# Altium PCB BB.GW.001.01.01.0 — копия.PcbDoc
Units mm, origin at the board's own origin, x right, y up, seen from the top; angles counter-clockwise.
Board outline 101.6 x 53 mm, 2 copper layers (Top Layer, Bottom Layer); 61 components, 35 nets, 162 pads, 0 vias.
Unrouted connection lines stored in the file: 81.
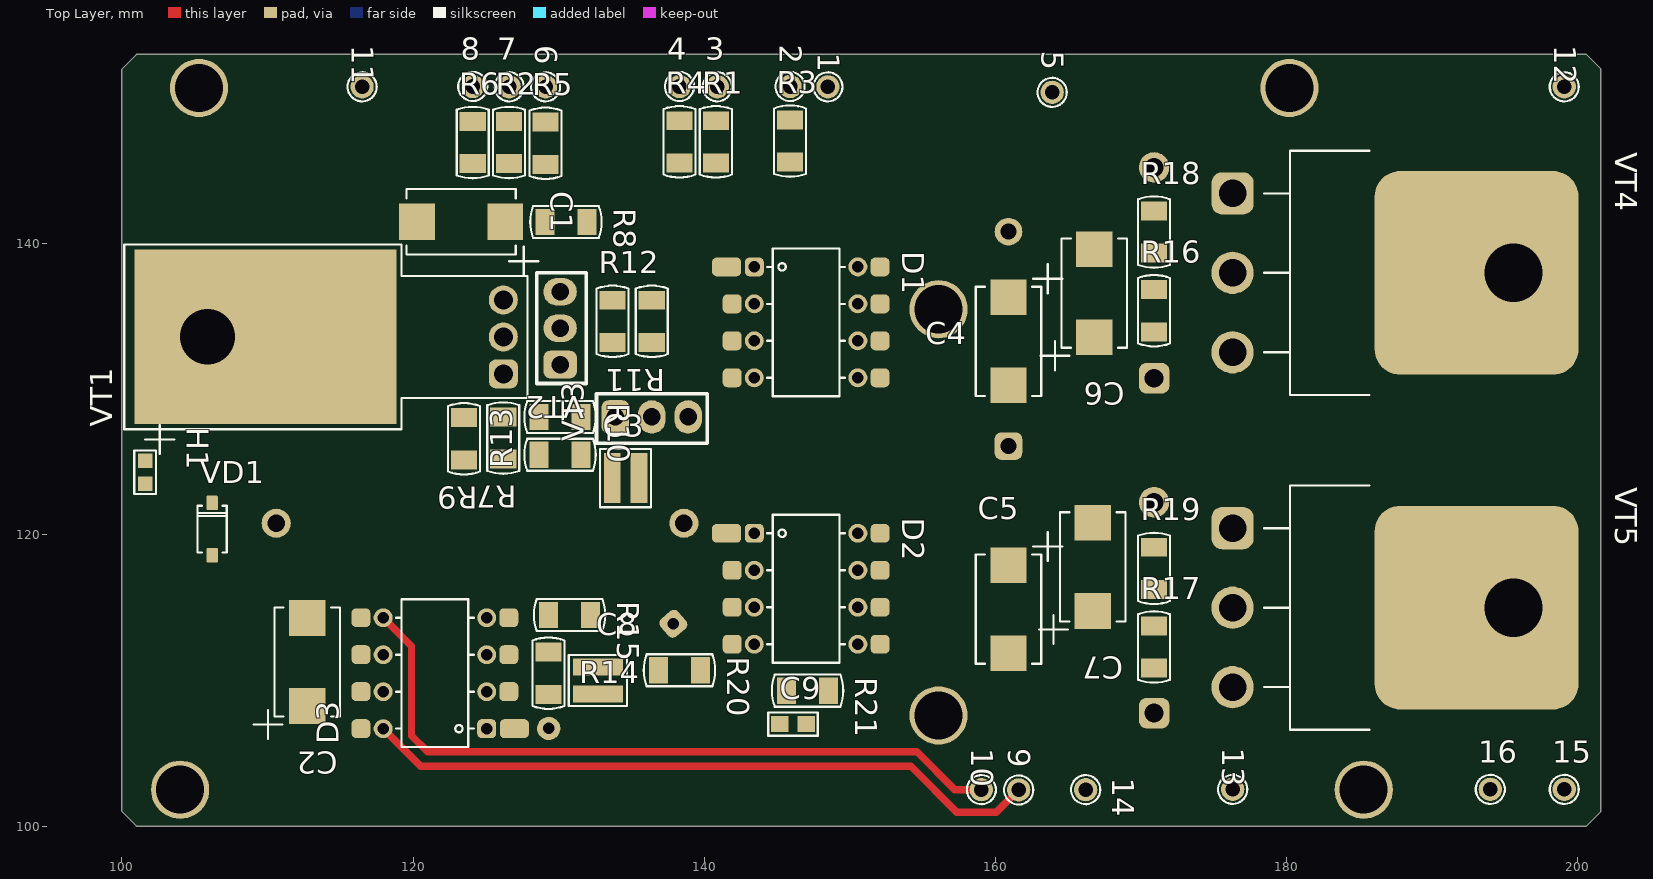
[diagram p0: Top Layer view]
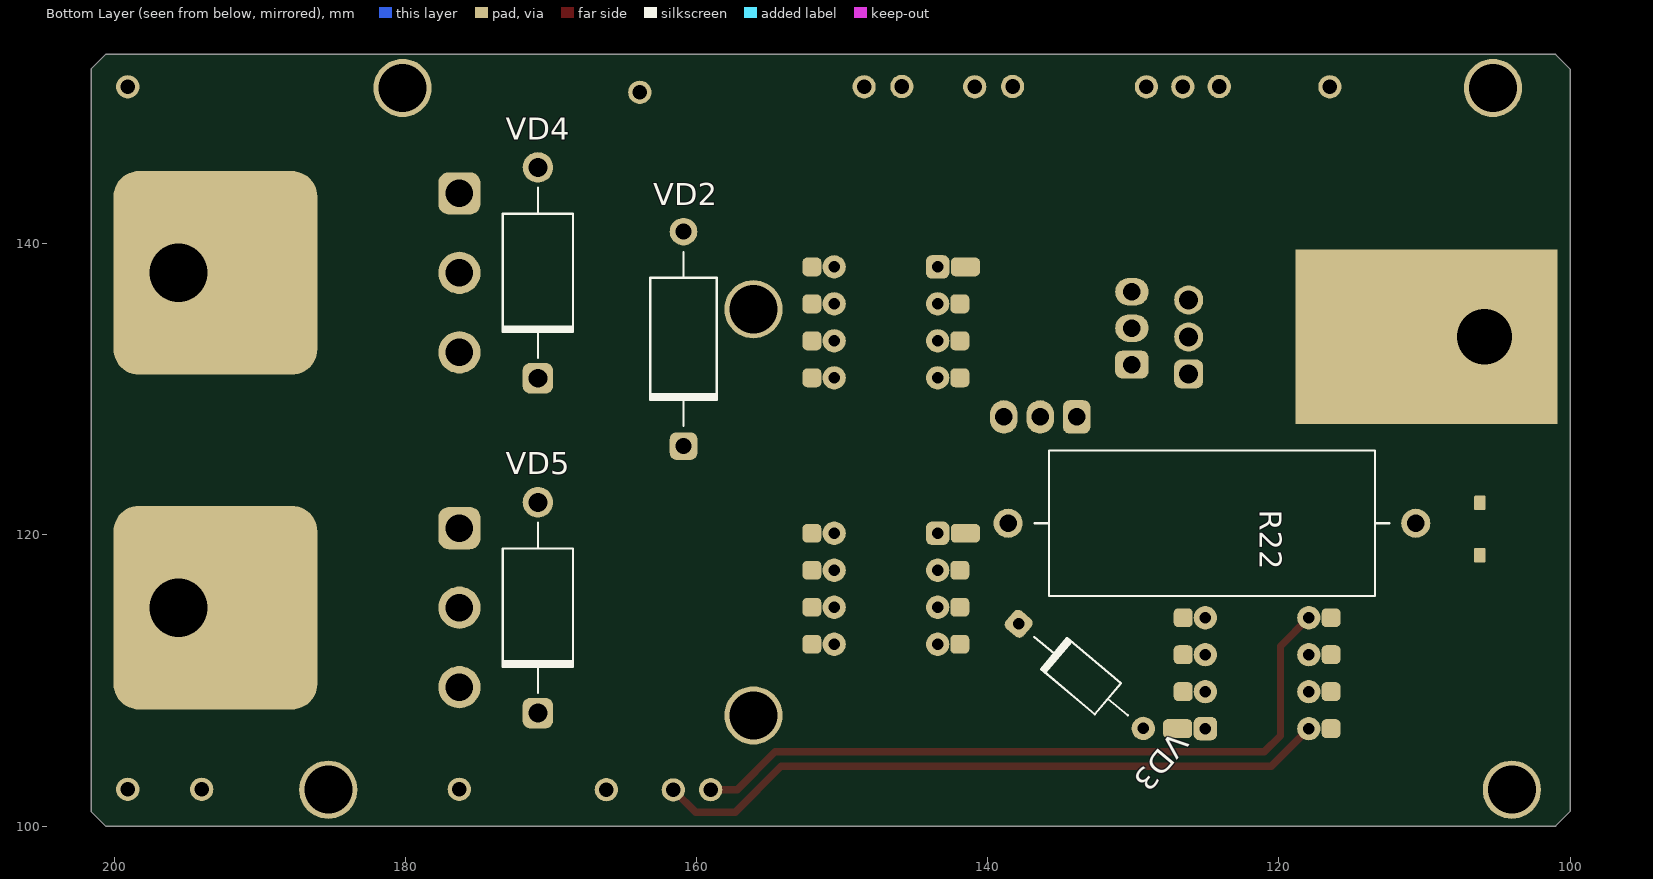
[diagram p1: Bottom Layer view, seen from below]

## Layer stack, top to bottom
Top Solder: solder mask 0.0102, Solder Resist, Dk 3.5
Top Layer: signal copper 0.0356
Dielectric 1: dielectric 0.32, FR-4, Dk 4.8
Bottom Layer: signal copper 0.0356
Bottom Solder: solder mask 0.0102, Solder Resist, Dk 3.5

## Board outline
101,100 100,101 100,152 101,153 200.6,153 201.6,152 201.6,101 200.6,100

## Design rules (kind name [scope] priority, off if disabled: settings)
Clearance [All] p1: gap=0.5 ignorepadtopadclearanceinfootprint=FALSE
PolygonConnect [All] p1: connectstyle=Relief reliefconductorwidth=0.254 reliefentries=4 polygonreliefangle="90 Angle" airgapwidth=0.254
RoutingVias [All] p1: holewidth=0.5 width=1.1 viastyle="Through Hole" minholewidth=0.5 minwidth=1.1 maxholewidth=0.5 maxwidth=1.1
SolderMaskExpansion [All] p1: expansion=0.102
Width Width_PowerLine [InNetClass('PowerLine')] p1: maxlimit=5 minlimit=1.5 preferedwidth=2
Width [All] p2: maxlimit=10 minlimit=0.5 preferedwidth=0.5 minimp=50.000000 maximp=50.000000 favimp=50.000000
30 further rules are at their usual default settings.

## Classes and differential pairs
net class PowerLine: Net12_1 Net13_1 Net14_1 Net15_1 NetC8_1

## Components (designator, comment, footprint, x,y, rotation, side; value= is the part's Value field where it differs from the comment)
1 "TP" TP1 148.5,150.78 r0 top
2 "TP" TP1 145.9,150.8 r0 top
3 "TP" TP1 140.9,150.78 r0 top
4 "TP" TP1 138.3,150.8 r0 top
5 "TP" TP1 163.9,150.4 r0 top
6 "TP" TP1 129.1,150.78 r0 top
7 "TP" TP1 126.6,150.78 r0 top
8 "TP" TP1 124.1,150.8 r0 top
9 "TP" TP1 161.6,102.48 r0 top
10 "TP" TP1 159.04,102.5 r0 top
11 "TP" TP1 116.5,150.78 r0 top
12 "TP" TP1 199.08,150.78 r0 top
13 "TP" TP1 176.3,102.52 r0 top
14 "TP" TP1 166.2,102.5 r270 top
15 "TP" TP1 199.08,102.52 r0 top
16 "TP" TP1 194,102.52 r0 top
C1 "47 мкФ" CAPMP7343X31N 123.3,141.5 r0 top
C2 "47 мкФ" CAPMP7343X31N 112.73,111.27 r270 top
C3 "33 п" CAPC1632X115M 134.6,123.9 r0 top
C4 "47 мкФ" CAPMP7343X31N 160.9,133.3 r90 top
C5 "47 мкФ" CAPMP7343X31N 160.9,114.9 r90 top
C6 "2.2 мкФ" CAPMP7343X31N 166.8,136.6 r270 top
C7 "2.2 мкФ" CAPMP7343X31N 166.7,117.8 r270 top
C8 "33 п" CAPC1632X115M 132.7,110 r90 top
C9 "100 пФ" CAPC1608M 146.1,107 r0 top
D1 "МикросхемаHCPL-3120" DIP-8 147,134.6 r270 top
D2 "МикросхемаHCPL-3120" DIP-8 147,116.3 r270 top
D3 "МикросхемаHCPL-3120" DIP-8 121.5,110.5 r90 top
H1 "KPG-1608ZGC" LED_1608X25N 101.6,124.3 r270 top
R1 "0" RESC3216N 140.8,147 r90 top
R2 "0" RESC3216N 126.6,146.95 r90 top
R3 "0" RESC3216N 145.9,147.05 r90 top
R4 "0" RESC3216N 138.3,147 r90 top
R5 "0" RESC3216N 129.1,146.9 r90 top
R6 "0" RESC3216N 124.1,146.95 r90 top
R7 "270" RESC3216N 126.2,126.65 r270 top
R8 "270" RESC3216N 130.5,141.5 r0 top
R9 "270" RESC3216N 123.5,126.6 r270 top
R10 "270" RESC3216N 130.1,128.1 r0 top
R11 "270" RESC3216N 136.4,134.67 r270 top
R12 "270" RESC3216N 133.7,134.67 r90 top
R13 "270" RESC3216N 130.1,125.5 r180 top
R14 "620" RESC3216N 129.3,110.5 r270 top
R15 "270" RESC3216N 130.75,114.5 r0 top
R16 "270 k" RESC3216N 170.9,135.4 r90 top
R17 "270 k" RESC3216N 170.9,112.3 r90 top
R18 "10" RESC3216N 170.9,140.8 r90 top
R19 "10" RESC3216N 170.9,117.7 r90 top
R20 "270" RESC3216N 138.3,110.7 r0 top
R21 "0" RESC3216N 147.1,109.3 r0 top
R22 "0.11" RESW_SQP-7 124.6,120.8 r180 bottom
VD1 "1N4148" SOD-123 106.2,120.4 r90 top
VD2 "FR20" DO-15 160.9,133.466 r90 bottom
VD3 "BZX5V1" DO-35 133.6,110.3 r220 bottom
VD4 "Stabistor_P6KE15CA" D2A 170.9,138 r90 bottom
VD5 "Stabistor_P6KE15CA" D2A 170.9,115 r90 bottom
VT1 "F9Z34N" TO-220_TH_Horizontal_Var#1 114.135,133.6 r90 top
VT2 "TRANSBIPOL_КТ361" Rus_КT-13 130.2,134.2 r270 top
VT3 "TRANSBIPOL_КТ315" Rus_КT-13 136.4,128 r180 top
VT4 "IGBT_IRG7PH42UD2PDF" TO-247AC 176.296,138 r270 top
VT5 "IGBT_IRG7PH42UD2PDF" TO-247AC 176.296,115 r270 top

## Footprints (in the part's own frame and the unit in brackets; to place one, negate y for a bottom-side part, rotate by r counter-clockwise, add the part's x,y. Pads: shape width x height; smd on the part's side, far side on the other; paste and mask are expansions set on the pad)
CAPC1608M [mm] "Chip Capacitor, Body 1.6x0.8mm, IPC Low Density"
  rect 1.2x1.1 smd: 1(-0.9,0) 2(0.9,0)
  Top Layer pour cut-out: -0.3,0.8 -0.3,-0.8 0.3,-0.8 0.3,0.8
  silkscreen extent -1.7,-0.8 1.7,0.8, body extent -0.88,-0.48 0.88,0.47, height 0.85
CAPC1632X115M [mm] "Chip Capacitor, 2-Leads, Body 1,6x3,2mm, IPC Low Density"
  rect 1.15x3.45 smd: 1(-0.925,0) 2(0.925,0)
  Top Layer pour cut-out: -0.4,2 -0.4,-2 0.4,-2 0.4,2
  silkscreen extent -1.75,-2 1.75,2, body extent -0.88,-1.67 0.87,1.68, height 1.15
CAPMP7343X31N [mm] "Molded Capacitor, 2-Leads, Body 7,30x4,30mm, IPC Medium Density"
  rect 2.45x2.5 smd: 1(-3.025,0) 2(3.025,0)
  silkscreen extent -3.75,-3.7 5.3,2.25, body extent -3.97,-2.25 3.97,2.25, height 3.1
D2A [mm]
  rrect50% 2.1x2.1 hole 1.3: 1(-7.239,0)
  round 2.1 hole 1.3: 2(7.239,0)
  silkscreen extent -5.84,-2.41 5.84,2.41
DIP-8 [mm]
  rrect50% 1.3x2 all layers, no hole: 1(-3.81,-5.461)
  rrect50% 1.3x1.3 / inner rrect50% 1.3x1.3 / far side rrect50% 1.6x1.6 hole 0.8: 1(-3.81,-3.556)
  rrect50% 1.3x1.3 all layers, no hole: 2(-1.27,-5.08) 3(1.27,-5.08) 4(3.81,-5.08) 5(3.81,5.08) 6(1.27,5.08) 7(-1.27,5.08) 8(-3.81,5.08)
  round 1.3 / inner round 1.3 / far side round 1.6 hole 0.8: 2(-1.27,-3.556) 3(1.27,-3.556) 4(3.81,-3.556) 5(3.81,3.556) 6(1.27,3.556) 7(-1.27,3.556) 8(-3.81,3.556)
  silkscreen extent -5.08,-2.67 5.08,2.67
DO-15 [mm]
  rrect50% 1.9x1.9 hole 1.1: 1(-7.366,0)
  round 1.9 hole 1.1: 2(7.366,0)
  silkscreen extent -5.97,-2.29 5.97,2.29
DO-35 [mm]
  rrect50% 1.6x1.6 hole 0.8: 1(-5.588,0)
  round 1.6 hole 0.8: 2(5.588,0)
  silkscreen extent -4.19,-1.4 4.19,1.4
LED_1608X25N [mm] "Chip LED lamp, 2-Leads, Body 1,60x0,80mm, IPC Medium Density"
  rect 1x1 smd: 1(-0.8,0) 2(0.8,0)
  silkscreen extent -3.25,-0.75 1.5,2, body extent -0.8,-0.4 0.8,0.4, height 0.62
RESC3216N [mm] "Chip Resistor, Body 3.2x1.6mm, IPC Medium Density"
  rect 1.3x1.8 smd: 1(-1.45,0) 2(1.45,0)
  Top Layer pour cut-out: -0.8,0.9 0.8,0.9 0.8,-0.9 -0.8,-0.9
  silkscreen extent -2.45,-1.1 2.45,1.1, body extent -1.68,-0.87 1.68,0.87, height 0.71
RESW_SQP-7 [mm] "Резистор мощный проволочный 5Вт; Body"
  round 2 hole 1.2: 1(-14,0) 2(14,0)
  silkscreen extent -12.2,-5 12.2,5, body extent -14.4,-4.5 14.4,4.5, height 9.5
Rus_КT-13 [mm] "THD; Body: L=7.2mm, B=3mm, H=5mm; Weight: ?g; Транзистор КТ315(А...И)"
  rrect50% 1.9x2.3 hole 1.2: B(2.5,-0.1)
  oval 1.9x2.3 hole 1.2: C(0,-0.1) E(-2.5,-0.1)
  silkscreen extent -3.8,-1.7 3.8,1.7, body extent -3.6,-1.5 3.6,1.5, height 6.7
SOD-123 [mm]
  rrect25% 1x0.8 all layers, no hole: 1(-1.8,0) 2(1.8,0)
  silkscreen extent -1.6,-1 1.6,1, body extent -1.9,-0.8 1.9,0.8, height 1.4
TO-220_TH_Horizontal_Var#1 [mm] "Transistor outline, TO-220, TH, требуеться прошивка. Формовку выводов см. приспособление ЛБИЮ.7803-0021-000 СБ"
  rrect50% 2x2 hole 1.3: 1(-2.54,-12.065)
  round 2 hole 1.3: 2(0,-12.065) 3(2.54,-12.065)
  rect 12x18 hole 3.8 copper offset 0,-3.986: 4(0,8.255)
  silkscreen extent -6.35,-13.72 6.35,13.97, body extent -5.27,-12.3 5.27,11.05, height 4.7
TO-247AC [mm]
  rrect25% 14x14 hole 4 copper offset 0,-2.54: C(0,19.304)
  round 2.9 hole 1.9: C(0,0) E(5.46,0)
  rrect50% 2.9x2.9 hole 1.9: G(-5.46,0)
  silkscreen extent -8.38,2.16 8.38,9.4
TP1 [mm] "Test point 1x1.6"
  round 1.6 hole 1 paste+0: 1(0,0)
  silkscreen extent -1,-1 1,1

## Part data
1 2 3 4 5 6 7 8 9 10 11 12 13 14 15 16: "Test point"
C1 C2 C4 C5 C7: library part Capacitor_Polar_TAJD, "Танталовый конденсатор", Power/Voltage="50 B", Tolerance={Tolerance}, Name=TAJD, Type=Конденсатор
C3 C8 C9: library part Capacitor_Chip, "Чип-конденсатор", Power/Voltage="50 B", Tolerance={Tolerance}, Name=1206, TKE/TKC={TKE/TKC}, Type=Конденсатор
C6: library part Capacitor_Polar_TAJD, "Танталовый конденсатор", Power/Voltage=50, Tolerance={Tolerance}, Name=TAJD, Type=Конденсатор
D1 D2 D3: library part Device_HCPL-3120, "2.5 Amp Output Current IGBT Gate Drive Optocoupler", Manufacturer="Avago, Avago Technologies", ManufacturerPartNumber=HCPL-3120, Category=Микросхема, ComponentLink1Description=DataSheet, ComponentLink1URL="k:\Projects\BB.001.00.00 (Преобразователь частотный)\Datashets\Функциональная группа ''A1''\hcpl-3120-500e.pdf", ComponentLink2Description=Package, ComponentLink2URL="k:\Projects\BB.001.00.00 (Преобразователь частотный)\Datashets\Функциональная группа ''A1''\hcpl-3120-500e.pdf#page=3"
  D1: Rule="Supply Nets [Voltage = 25.00]"
  D2 D3: Rule=Undefined
H1: library part LED, "Светодиод", Manufacturer=Kingbright, ManufacturerPartNumber=KPG-1608ZGC, Type=Светодиод
R1 R2 R3 R4 R5 R6 R7 R8 R9 R10 R11 R12 R13 R14 R15 R16 R17 R18 R19 R20 R21: library part Resistor_Chip, "Чип-резистор", Tolerance={Tolerance}, Type=Резистор
R22: library part Resistor_TH, "Резистор", Tolerance={Tolerance}, Type=Резистор
VD1: library part Diode_4148, "Диод", Manufacturer="WTE power Semiconductor", ManufacturerPartNumber=1N4148, Price=3, Type=Диод
VD2: library part Diode_FR20..Serial, "Диод", Manufacturer="WTE power Semiconductor", ManufacturerPartNumber=FR20, Type=Диод
VD3: library part Diode_BZX5V1, "Диод", Manufacturer="WTE power Semiconductor", ManufacturerPartNumber=BZX5V1, Type=Диод
VD4 VD5: "Стабилитрон", ManufacturerPartNumber=P6KE15CA, Type=Стабилитрон
VT1: library part FET_F9Z34N, "Транзистор полевой", Package="Корпус КТ-9С", ManufacturerPartNumber=F9Z34N, Type=Транзистор
VT2: "Транзистор биполярный", ManufacturerPartNumber=КТ361, Package=KT-13, Type=Транзистор
VT3: "Транзистор биполярный", ManufacturerPartNumber=КТ315, Package=KT-13, Type=Транзистор
VT4 VT5: "insulated gate bipolar transistor with  ultrafast soft recovery diode", ManufacturerPartNumber=IRG7PH42UD2PDF, Package=TO-247AC

## Free pads (board coordinates)
  round 4 hole 3.3 unplated: MH3.(105.3,150.7) MH3.(156.1,107.6) MH3.(156.1,135.5) MH3.(180.2,150.7) MH3.(185.3,102.5) MH3.2(104,102.5)

## Nets (pads, with @x,y where several pads share a name; then routed paths per layer and width w, separated by ;. In a path a pad name is that pad's centre, name@x,y a point inside that pad or via, vN(x,y) a via of type N, cw(c..) or ccw(c..) an arc to the next point about the centre after c; other vN are vias at no path point)
GND: 11.1 C1.1 H1.2 R7.2 R13.2 VT3.E
Net1_1: 1.1 D1.2 D2.2 VT1.2
Net2_1: 2.1 R3.2
Net3_1: 3.1 R1.2
Net4_1: 4.1 R4.2
Net5_1: 5.1 C5.2 D2.8 VD2.1
Net6_1: 6.1 R5.2
Net7_1: 7.1 R2.2
Net8_1: 8.1 R6.2
Net9_1: 9.1 C2.2 D3.8 | length 46.7
  Top Layer w0.5: D3.8@117.944,106.69 120.534,104.1 154.2,104.1 157.35,100.95 160.07,100.95 9.1
Net10_1: 10.1 C2.1 D3.5 | length 49.6
  Top Layer w0.5: D3.5@117.944,114.31 119.9,112.354 119.9,106.2 121,105.1 154.614,105.1 157.214,102.5 10.1
Net12_1: 12.1 VT4.C
Net13_1: 13.1 C5.1 D2.5 R21.2 VD5.1 VT5.E
Net14_1: 14.1 C9.2 R20.2 R22.1
Net15_1: 15.1 16.1 C4.1 D1.5 VD4.1 VT4.E VT5.C
NetC1_2: C1.2 R8.1 VT1.3 VT2.E
NetC3_1: C3.1 R10.2 R12.1 R13.1 VT3.B
NetC3_2: C3.2 R11.2 VT3.C
NetC4_2: C4.2 D1.8 VD2.2
NetC6_1: C6.1 R16.2 R18.1
NetC6_2: C6.2 D1.6 D1.7 R16.1
NetC7_1: C7.1 R17.2 R19.1
NetC7_2: C7.2 D2.6 D2.7 R17.1
NetC8_1: C8.1 C9.1 D3.2 R14.2 R21.1 R22.2 VD3.2
NetC8_2: C8.2 R15.2 R20.1 VD3.1
NetD1_3: D1.3 R1.1 R3.1 R4.1
NetD2_3: D2.3 R2.1 R5.1 R6.1
NetD3_3: D3.3 R14.1 R15.1
NetD3_6: D3.6 D3.7 VD1.1
NetH1_1: H1.1 R9.2
NetR7_1: R7.1 R9.1 R10.1 VT1.1 VT2.C
NetR8_2: R8.2 R11.1 VT2.B
NetR12_2: R12.2 VD1.2
NetR18_2: R18.2 VD4.2 VT4.G
NetR19_2: R19.2 VD5.2 VT5.G
pads on no net: D1.1 D1.4 D2.1 D2.4 D3.1 D3.4 VT1.4

## Silkscreen, mask and mechanical layers (free items; w line width, h text height)
Board:
  the board outline again, w0.4
Arduino Uno R3:
  circle w0.025: c151.02,102.52 r0.5
  circle w0.025: c148.48,102.52 r0.5
  circle w0.025: c145.94,102.52 r0.5
  circle w0.025: c143.4,102.52 r0.5
  circle w0.025: c133.24,102.52 r0.5
  circle w0.025: c130.7,102.52 r0.5
  circle w0.025: c128.16,102.52 r0.5
  circle w0.025: c125.62,102.52 r0.5
  circle w0.025: c123.08,102.52 r0.5
  circle w0.025: c120.54,102.52 r0.5
  circle w0.025: c151.02,150.78 r0.5
  circle w0.025: c148.48,150.78 r0.5
  circle w0.025: c145.94,150.78 r0.5
  circle w0.025: c143.4,150.78 r0.5
  circle w0.025: c140.86,150.78 r0.5
  circle w0.025: c138.32,150.78 r0.5
  circle w0.025: c129.17,150.78 r0.5
  circle w0.025: c126.63,150.78 r0.5
  circle w0.025: c124.09,150.78 r0.5
  circle w0.025: c121.55,150.78 r0.5
  circle w0.025: c119.01,150.78 r0.5
  circle w0.025: c116.47,150.78 r0.5
  circle w0.025: c113.93,150.78 r0.5
  circle w0.025: c111.39,150.78 r0.5
  circle w0.025: c153.56,150.78 r0.5
  circle w0.025: c153.56,102.52 r0.5
  circle w0.025: c140.86,102.52 r0.5
  circle w0.025: c135.78,102.52 r0.5
  circle w0.025: c131.71,150.78 r0.5
  circle w0.025: c135.78,150.78 r0.5
  circle w0.025: c156.1,107.6 r1.587
  circle w0.025: c104.03,102.52 r1.587
  circle w0.025: c156.1,135.54 r1.587
  circle w0.025: c105.3,150.78 r1.587
  circle w0.025: c118,102.52 r0.5
  circle w0.025: c108.85,150.78 r0.5
  lines w0.025: 90.06,99.98 90.06,153.32 154.6,153.32 156.1,151.82 156.1,140.366 158.64,137.826 158.64,105.06 156.1,102.52 156.1,99.98 90.06,99.98
  lines w0.254: 108.362,150.78 154.06,150.78 199.08,150.78 199.08,102.52 ; 118,102.52 199.08,102.52 ; 201.6,100 199.08,102.52
  text "SCL" at 109.275,152 h1.5 r90
  text "SDA" at 111.815,152 h1.5 r90
  text "AREF" at 114.355,152 h1.5 r90
  text "GND" at 116.895,152 h1.5 r90
  text "D13" at 119.435,152 h1.5 r90
  text "D12" at 121.975,152 h1.5 r90
  text "D11~~" at 124.515,152 h1.5 r90
  text "D10~~" at 127.055,152 h1.5 r90
  text "D9~~" at 129.595,152 h1.5 r90
  text "D8" at 132.135,152 h1.5 r90
  text "D7" at 136.205,152 h1.5 r90
  text "D6~~" at 138.745,152 h1.5 r90
  text "D5~~" at 141.285,152 h1.5 r90
  text "D4" at 143.825,152 h1.5 r90
  text "D3~~" at 146.365,152 h1.5 r90
  text "D2" at 148.905,152 h1.5 r90
  text "D1(RX<-)" at 151.445,152 h1.5 r90
  text "D0(RX<-)" at 153.985,152 h1.5 r90
  text "A5" at 154.051,98.171 h1.5 r90
  text "A6" at 118.495,98.157 h1.5 r90
  text "I0REF" at 121.035,98.157 h1.5 r90
  text "RESET" at 123.575,98.157 h1.5 r90
  text "3.3V" at 126.115,98.157 h1.5 r90
  text "5V" at 128.655,98.157 h1.5 r90
  text "GND" at 131.195,98.157 h1.5 r90
  text "GND" at 133.735,98.157 h1.5 r90
  text "VIN" at 136.275,98.157 h1.5 r90
  text "A0" at 141.355,98.157 h1.5 r90
  text "A1" at 143.895,98.157 h1.5 r90
  text "A2" at 146.435,98.157 h1.5 r90
  text "A3" at 148.975,98.157 h1.5 r90
  text "A4" at 151.515,98.157 h1.5 r90